# Altium PCB PCB.PcbDoc
Units mm, origin at the board's own origin, x right, y up, seen from the top; angles counter-clockwise.
Board outline 83 x 36 mm, 4 copper layers (Top Layer, Int1 (GND), Int2 (PWR), Bottom Layer), stack 1.369 mm thick; 146 components, 191 nets, 522 pads, 0 vias.
Unrouted connection lines stored in the file: 305.
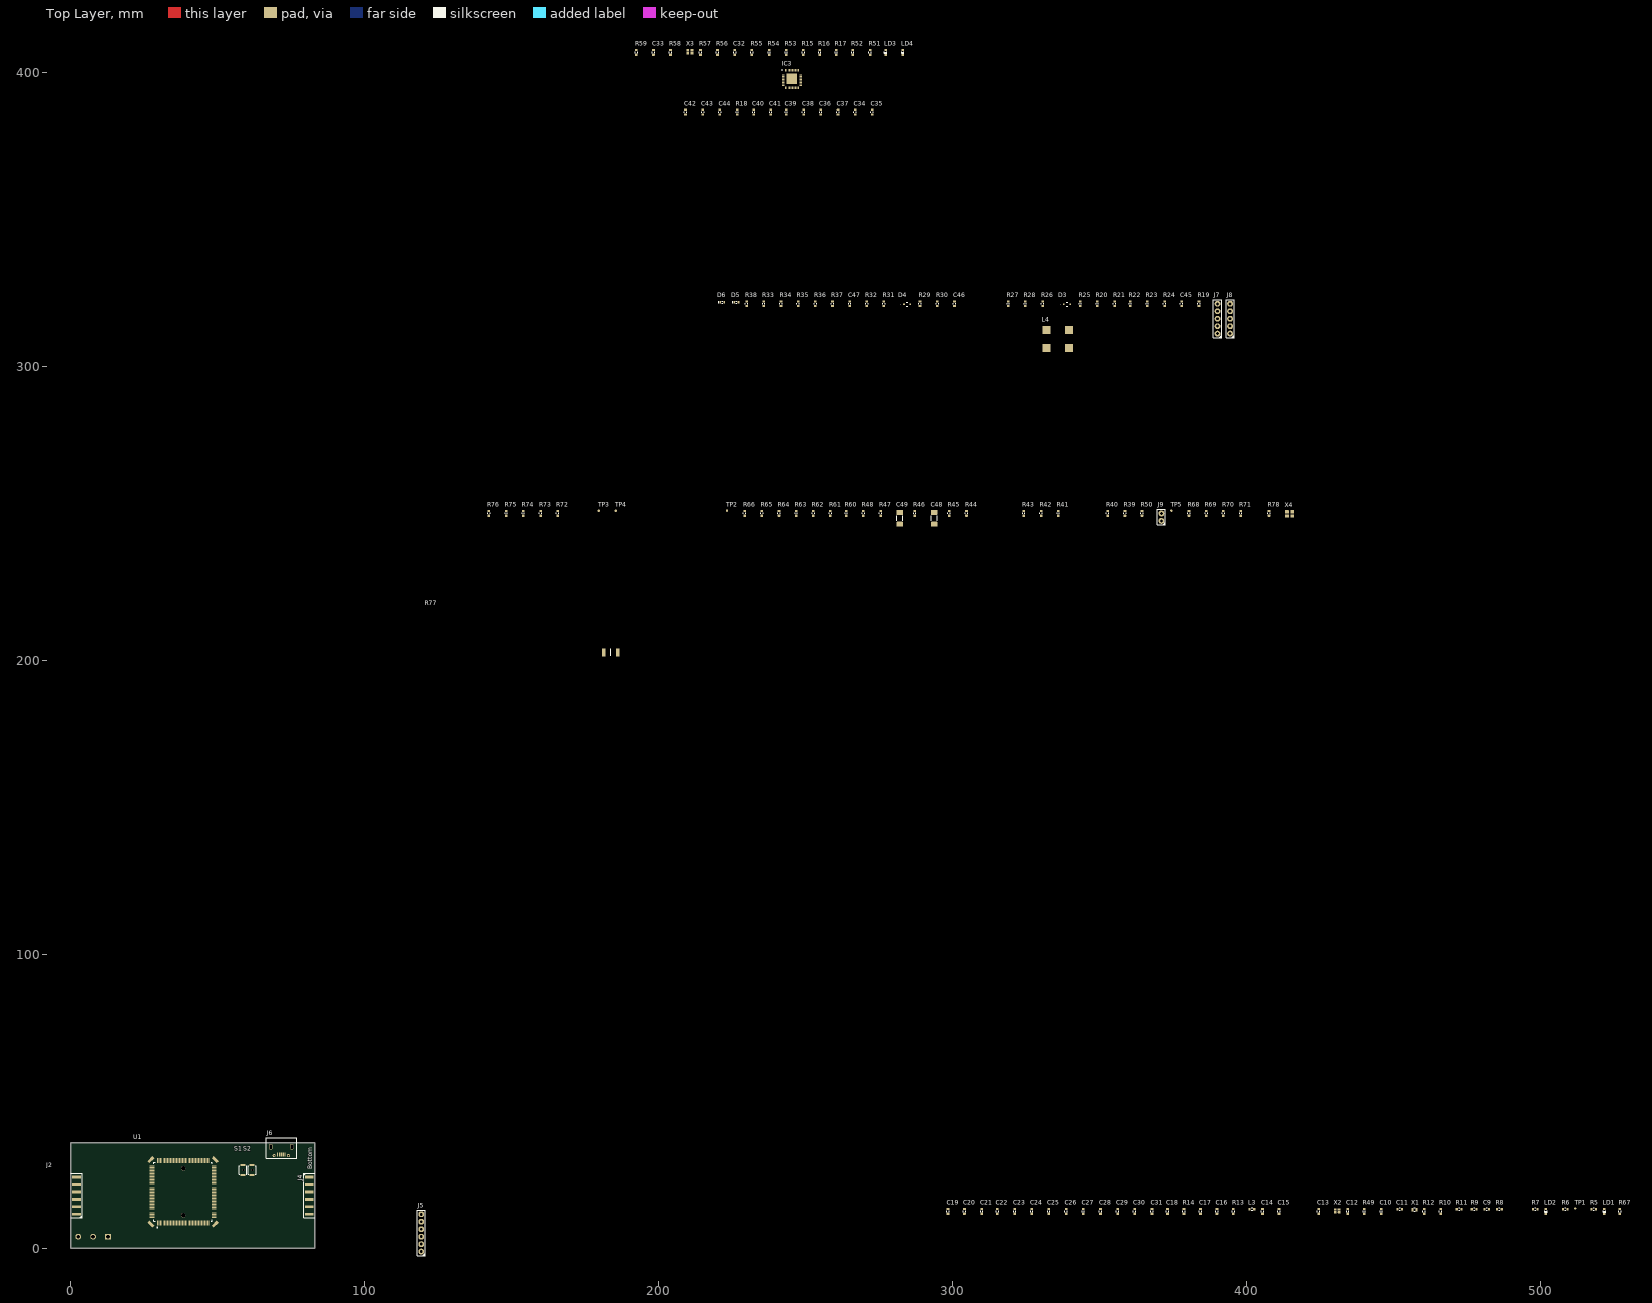
[diagram p0: Top Layer view]
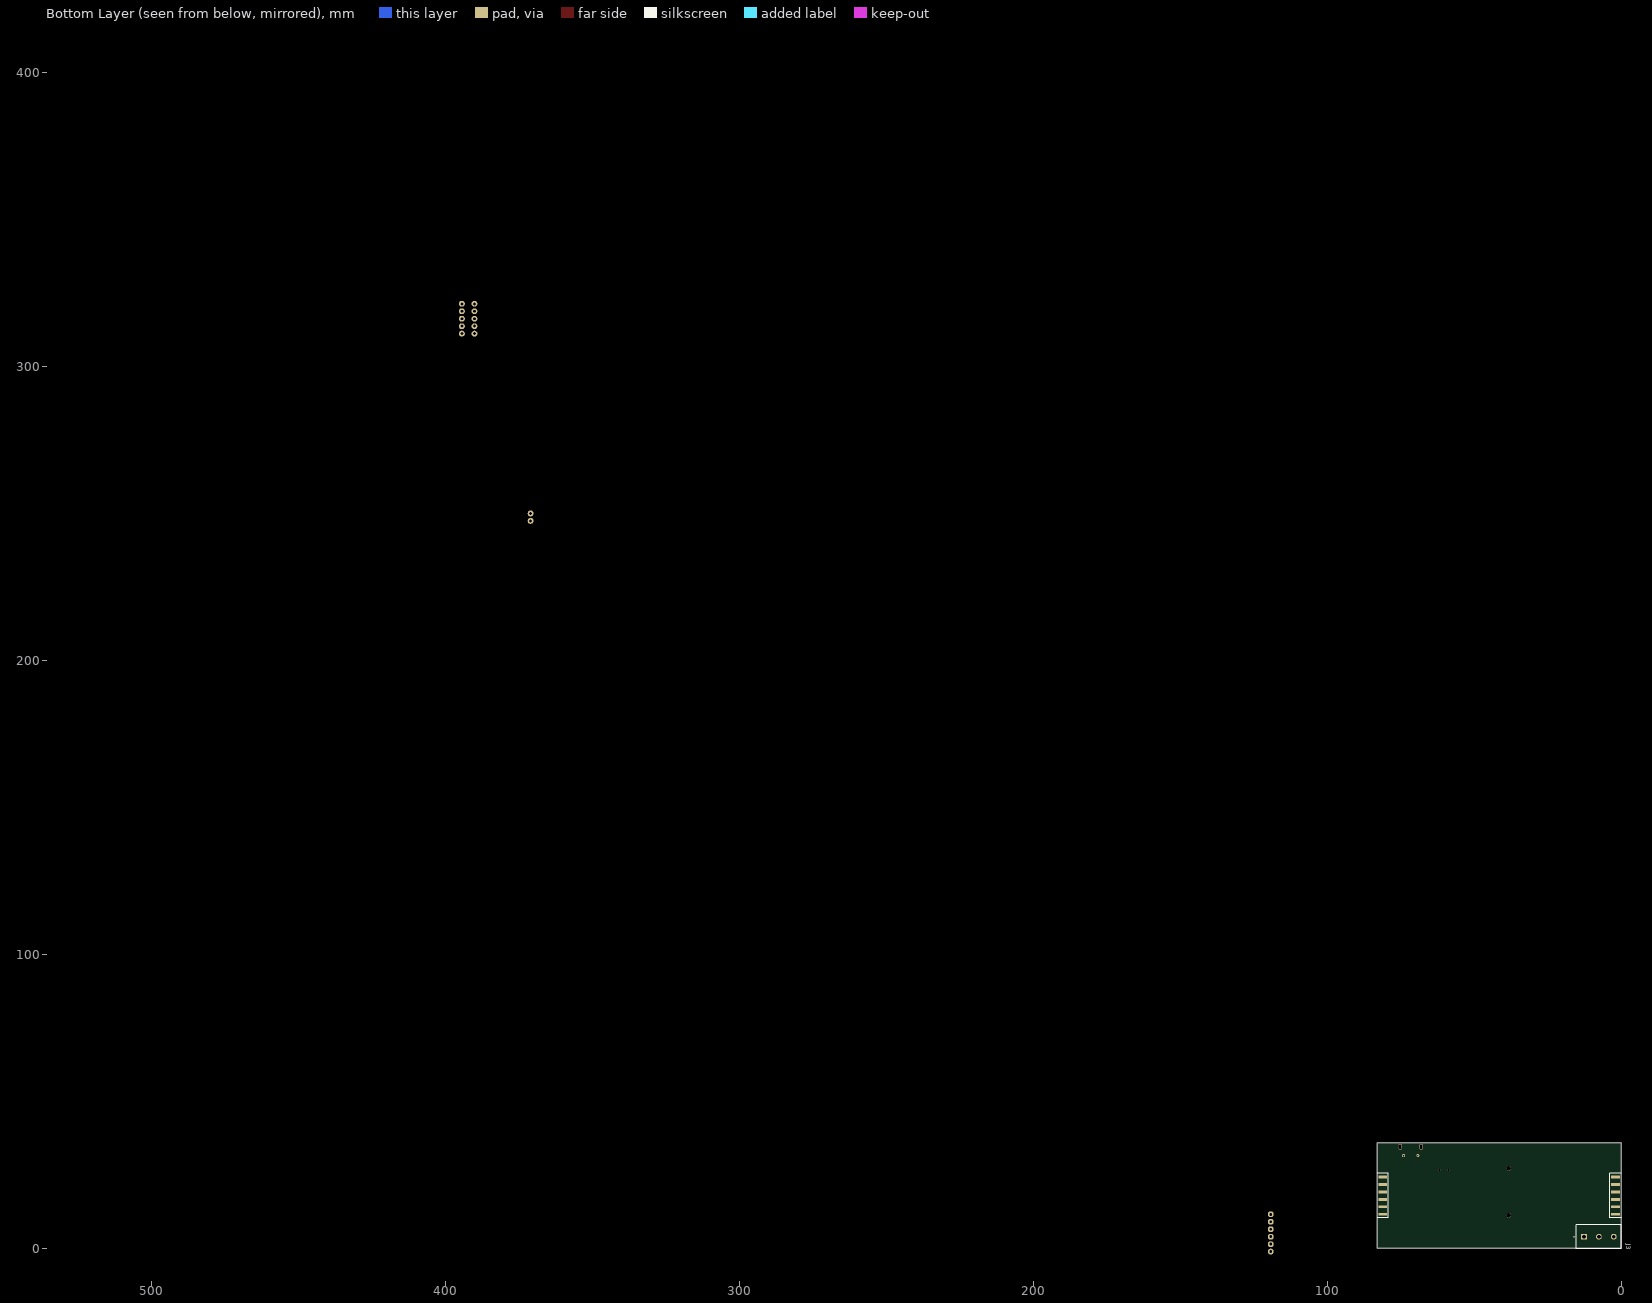
[diagram p1: Bottom Layer view, seen from below]
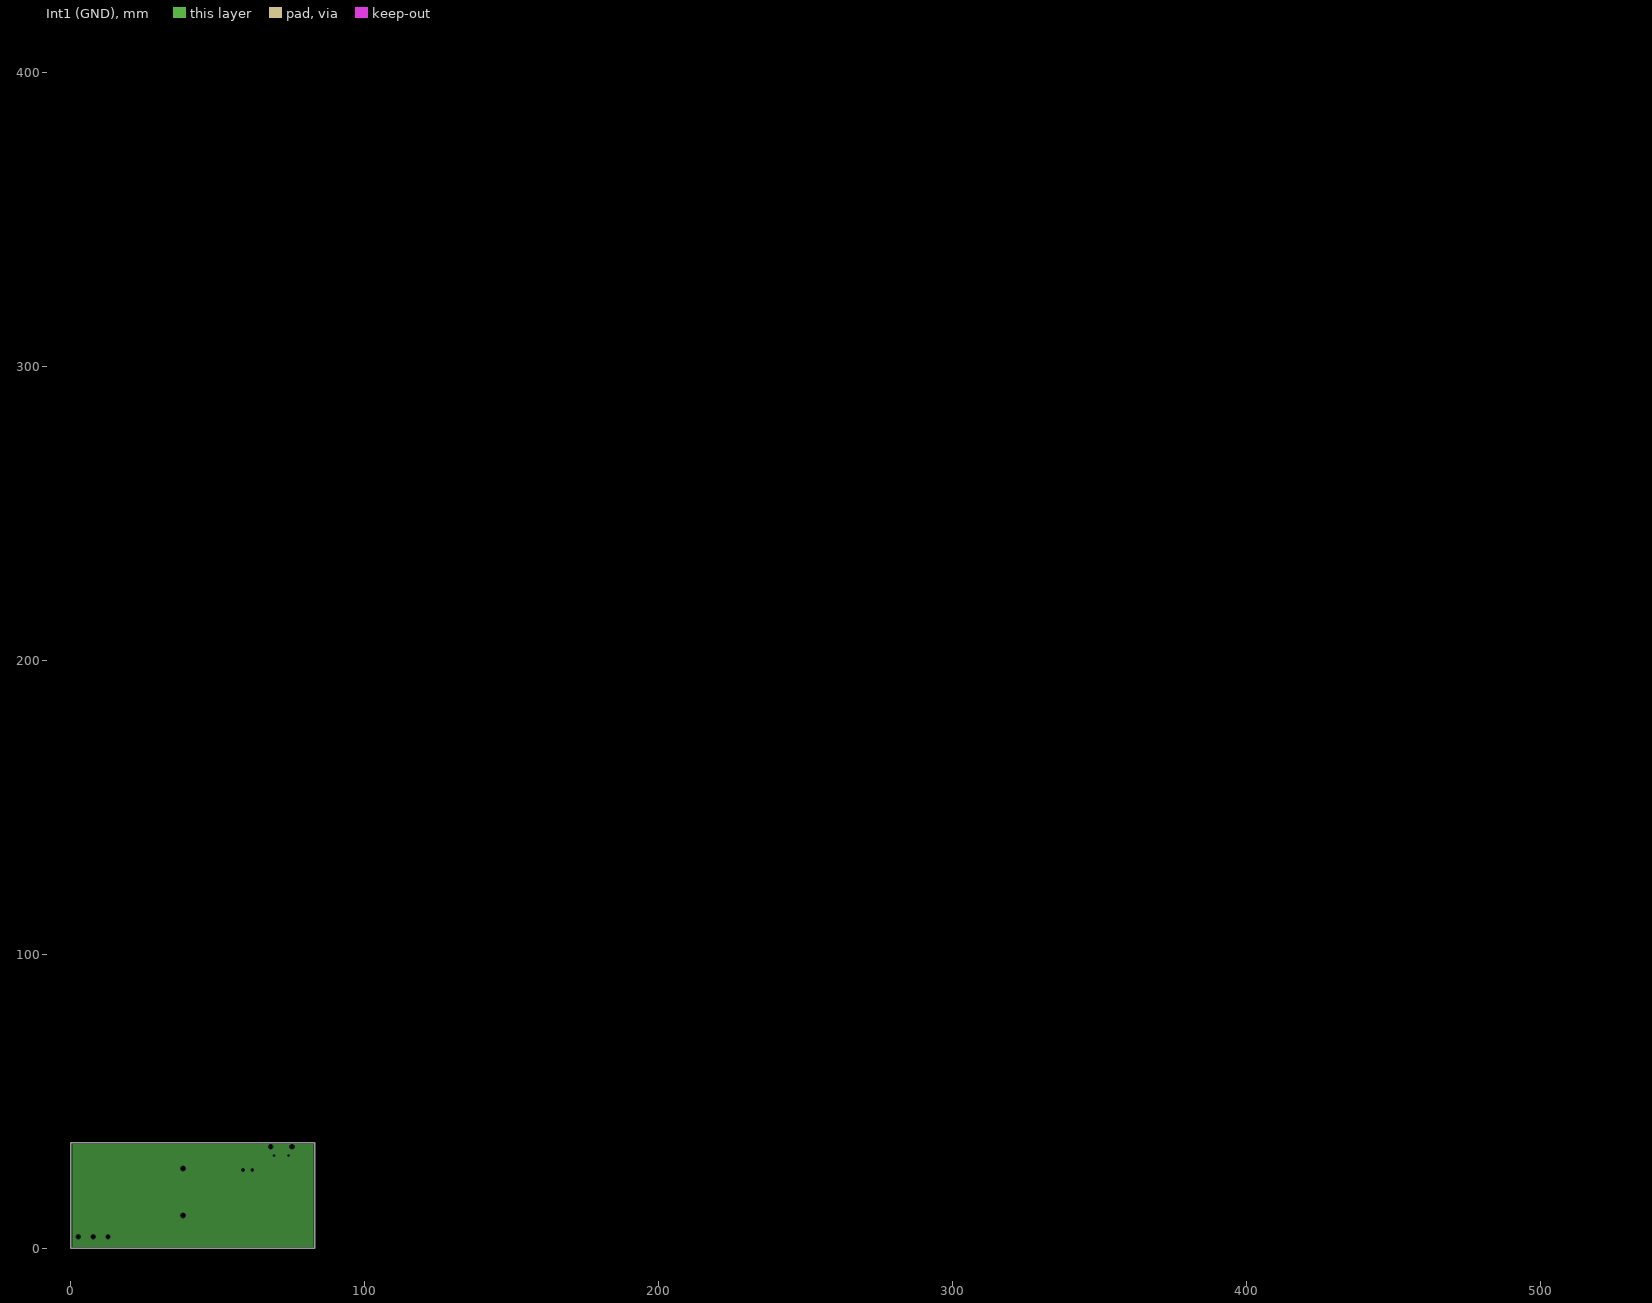
[diagram p2: Int1 (GND), clearances drawn from the general rule]
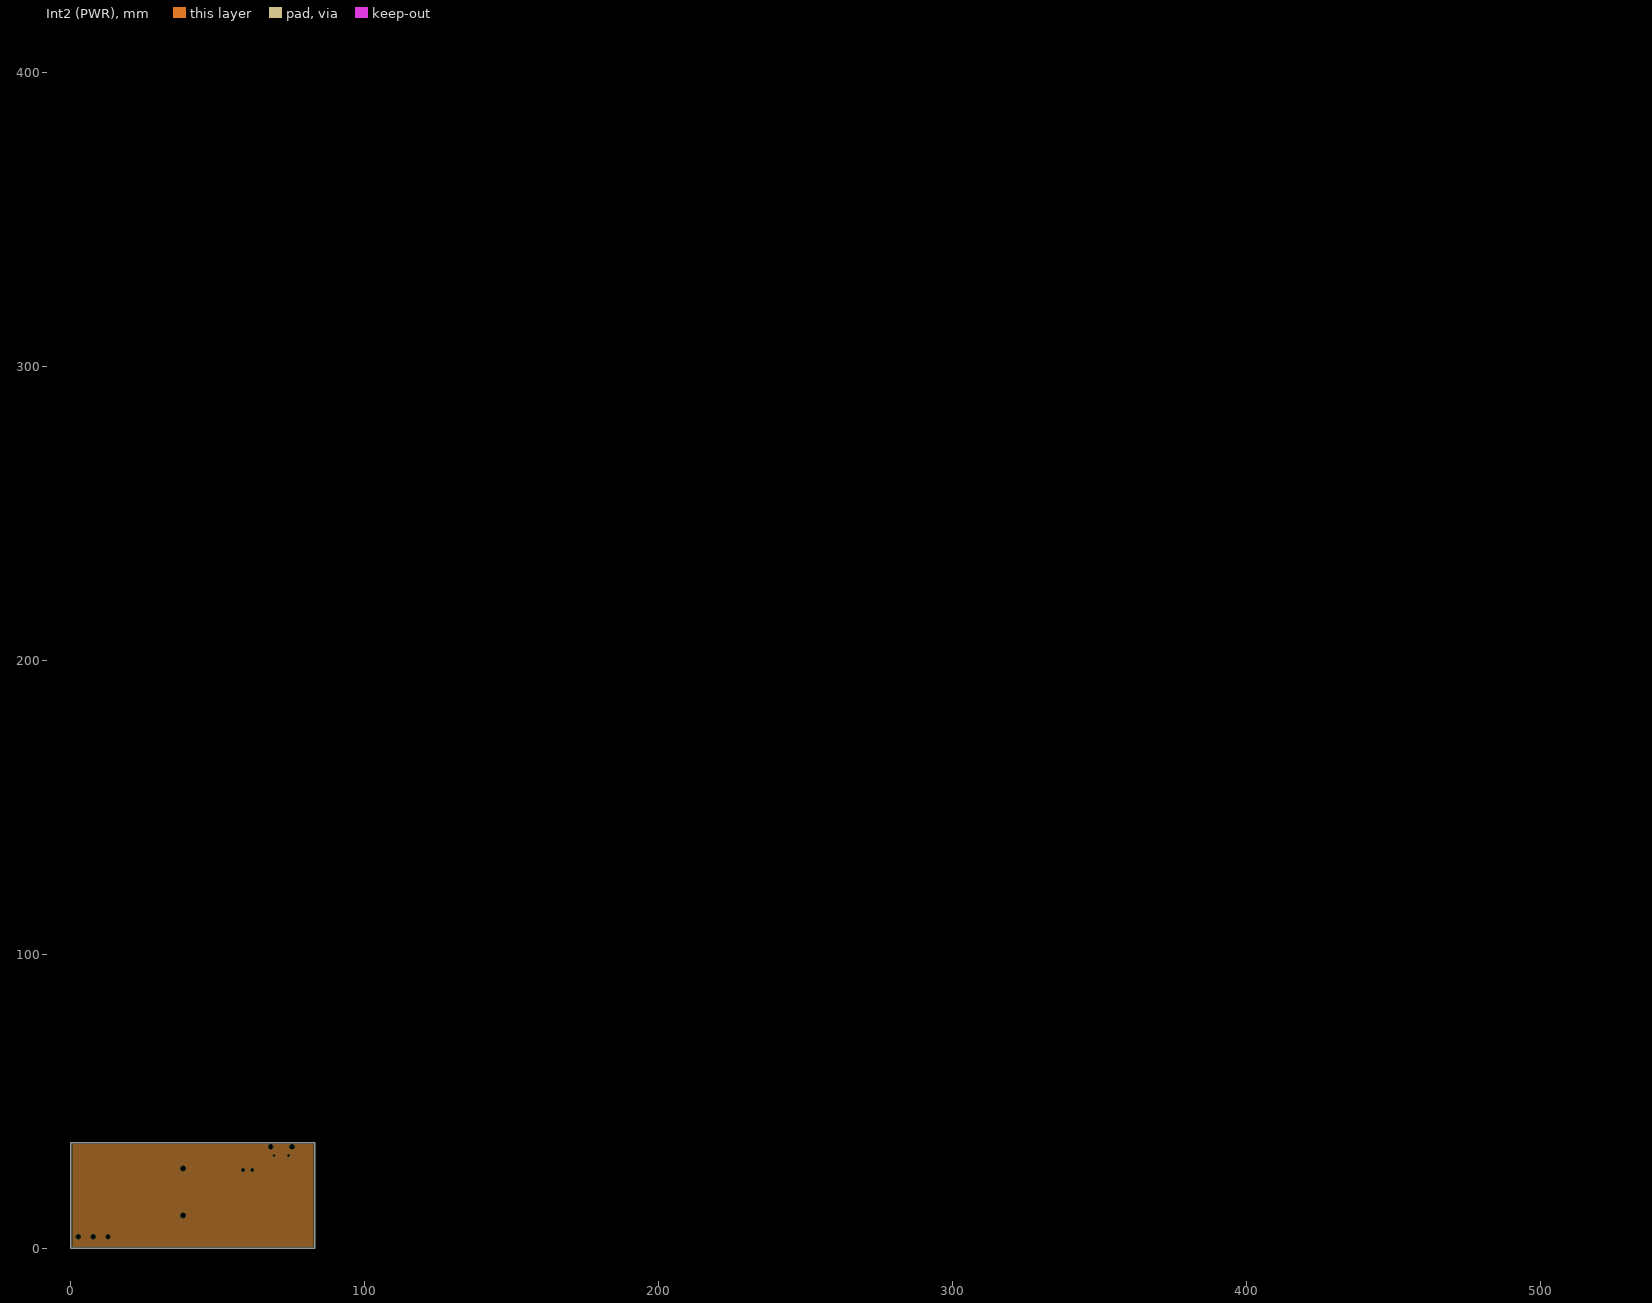
[diagram p3: Int2 (PWR), clearances drawn from the general rule]

## Layer stack, top to bottom
Top Solder: solder mask 0.0254, SM-001, Dk 4
Top Layer: signal copper 0.035
Dielectric 1: prepreg 0.1295, PP-017, Dk 4.3
Dielectric 2: prepreg 0.1295, PP-017, Dk 4.3
Int1 (GND): plane copper 0.035
Dielectric 3: core 0.7112, Core-039, Dk 4.8
Int2 (PWR): plane copper 0.035
Dielectric 4: prepreg 0.1295, PP-017, Dk 4.3
Dielectric 5: prepreg 0.1295, PP-017, Dk 4.3
Bottom Layer: signal copper 0.035
Bottom Solder: solder mask 0.0254, SM-001, Dk 4

## Board outline
0,0 83,0 83,36 0,36

## Design rules (kind name [scope] priority, off if disabled: settings)
AssemblyTestPointUsage [All] p1 off:
AssemblyTestpoint [All] p1 off: testpointundercomponent=TRUE minsize=1.016 maxsize=2.54 preferedsize=1.524 minholesize=0 maxholesize=1.016 preferedholesize=0.813 testpointgrid=0.025 usegrid=TRUE gridtolerance=0 allowsidetop=TRUE allowsidebottom=TRUE
Clearance [All] p1: gap=0.15 ignorepadtopadclearanceinfootprint=TRUE
ComponentClearance [All] p1 off: gap=0.254 collisioncheckmode=3 verticalgap=0.254 showdistances=FALSE
DiffPairsRouting [All] p1 off: maxlimit=0.254 minlimit=0.254 mostfreqgap=0.254 toplayer_minwidth=0.381 toplayer_maxwidth=0.381 toplayer_prefwidth=0.381 bottomlayer_minwidth=0.381 bottomlayer_maxwidth=0.381 bottomlayer_prefwidth=0.381 maxuncoupledlength=12.7
FabricationTestPointUsage [All] p1 off: valid=0 allowmultiple=FALSE
FabricationTestpoint [All] p1 off: side=3 testpointundercomponent=TRUE minsize=1.016 maxsize=2.54 preferedsize=1.524 minholesize=0 maxholesize=1.016 preferedholesize=0.813 testpointgrid=0.025 allowsidetop=TRUE allowsidebottom=TRUE usegrid=TRUE gridtolerance=0
FanoutControl Fanout_BGA [IsBGA] p1 off: bgadir=Out bgaviamode=Centered fanoutstyle=Auto fanoutdirection=Alternating viagrid=0.025 // Fanout_BGA (Default Rule)
FanoutControl Fanout_LCC [IsLCC] p2 off: bgadir=Out bgaviamode=Centered fanoutstyle=Auto fanoutdirection=Alternating viagrid=0.025 // Fanout_LCC (Default Rule)
FanoutControl Fanout_SOIC [IsSOIC] p3 off: bgadir=Out bgaviamode=Centered fanoutstyle=Auto fanoutdirection=Alternating viagrid=0.025 // Fanout_SOIC (Default Rule)
FanoutControl Fanout_Small [(CompPinCount < 5)] p4 off: bgadir=Out bgaviamode=Centered fanoutstyle=Auto fanoutdirection=OutThenIn viagrid=0.025 // Fanout_Small (Default Rule)
FanoutControl Fanout_Default [All] p5 off: bgadir=Out bgaviamode=Centered fanoutstyle=Auto fanoutdirection=Alternating viagrid=0.025 // Fanout_Default (Default Rule)
Height [All] p1 off: minheight=0 maxheight=25.4 prefheight=12.7
HoleSize [All] p1 off: absolutevalues=TRUE maxlimit=2.54 minlimit=0.025 maxpercent=80.000 minpercent=20.000
HoleToHoleClearance [All] p1 off: gap=0.254 allowstackedmicrovias=TRUE
LayerPairs [All] p1 off: enforce=TRUE
MinimumSolderMaskSliver [All] p1 off: minsoldermaskwidth=0.254
NetAntennae [All] p1 off: netantennaetolerance=0
PasteMaskExpansion [All] p1 off: expansion=0
PlaneClearance [All] p1: clearance=0.25
PlaneConnect [All] p1: planeconnectstyle=Relief reliefexpansion=0.508 reliefentries=4 reliefconductorwidth=0.254 reliefairgap=0.254
PolygonConnect [All] p1: thpad.connectstyle=Relief thpad.reliefconductorwidth=0.254 thpad.reliefentries=4 thpad.polygonreliefangle="90 Angle" thpad.airgapwidth=0.254 smdpad.connectstyle=Relief smdpad.reliefconductorwidth=0.254 smdpad.reliefentries=4 smdpad.polygonreliefangle="90 Angle" smdpad.airgapwidth=0.254 via.connectstyle=Direct via.reliefconductorwidth=0.254 via.reliefentries=4 via.polygonreliefangle="90 Angle" via.airgapwidth=0.254
RoutingCorners [All] p1 off: cornerstyle=45-Degree minsetback=2.54 maxsetback=2.54
RoutingLayers [All] p1 off: top layer_v5=TRUE bottom layer_v5=TRUE
RoutingPriority [All] p1 off: routingpriority=0
RoutingTopology [All] p1 off: topology=Shortest
RoutingVias [All] p1: holewidth=0.15 width=0.5 viastyle="Through Hole" minholewidth=0.15 minwidth=0.5 maxholewidth=0.15 maxwidth=0.5 viatemplateguid#1={0F8D6943-ADF0-4AAE-A0C8-86B730172CDF} viatemplatename#1=v50h15m0mx0
SilkToSilkClearance [All] p1 off: silktosilkclearance=0.254
SilkToSolderMaskClearance [IsPad] p1 off: minsilkscreentomaskgap=0.254 clearancetoexposedcopper=TRUE
SolderMaskExpansion [All] p1 off: expansion=0.102
Width [All] p1: maxlimit=2 minlimit=0.15 preferedwidth=0.25
4 further rules are at their usual default settings.

## Classes and differential pairs
component class Designator: C9 C10 C11 C12 C13 C14 C15 C16 C17 C18 C19 C20 C21 C22 C23 C24 C25 C26 C27 C28 C29 C30 C31 L3 LD1 LD2 R5 R6 R7 R8 R9 R10 R11 R12 R13 R14 R49 R67 S1 S2 TP1 U1 X1 X2

## Components (designator, comment, footprint, x,y, rotation, side; value= is the part's Value field where it differs from the comment)
C9 "NM" "CAPACITOR 1608 REFLOW" 481.699,13.4 r0 top
C10 "2pF" "CAPACITOR 1608 REFLOW" 445.799,12.6 r90 top
C11 "2pF" "CAPACITOR 1608 REFLOW" 452.099,13.4 r0 top
C12 "4.3pF" "CAPACITOR 1608 REFLOW" 434.4,12.6 r90 top
C13 "4.3pF" "CAPACITOR 1608 REFLOW" 424.5,12.6 r90 top
C14 "2.2uF" "CAPACITOR 1608 REFLOW" 405.4,12.6 r90 top
C15 "100nF" "CAPACITOR 1608 REFLOW" 411,12.6 r90 top
C16 "2.2uF" "CAPACITOR 1608 REFLOW" 389.9,12.6 r90 top
C17 "1uF" "CAPACITOR 1608 REFLOW" 384.3,12.6 r90 top
C18 "100nF" "CAPACITOR 1608 REFLOW" 373.1,12.6 r90 top
C19 "100nF" "CAPACITOR 1608 REFLOW" 298.4,12.6 r90 top
C20 "100nF" "CAPACITOR 1608 REFLOW" 304,12.6 r90 top
C21 "100nF" "CAPACITOR 1608 REFLOW" 309.9,12.6 r90 top
C22 "100nF" "CAPACITOR 1608 REFLOW" 315.2,12.6 r90 top
C23 "100nF" "CAPACITOR 1608 REFLOW" 321.1,12.6 r90 top
C24 "100nF" "CAPACITOR 1608 REFLOW" 326.9,12.6 r90 top
C25 "100nF" "CAPACITOR 1608 REFLOW" 332.7,12.6 r90 top
C26 "100nF" "CAPACITOR 1608 REFLOW" 338.6,12.6 r90 top
C27 "100nF" "CAPACITOR 1608 REFLOW" 344.4,12.6 r90 top
C28 "100nF" "CAPACITOR 1608 REFLOW" 350.3,12.6 r90 top
C29 "100nF" "CAPACITOR 1608 REFLOW" 356.1,12.6 r90 top
C30 "100nF" "CAPACITOR 1608 REFLOW" 361.9,12.6 r90 top
C31 "4.7uF" "CAPACITOR 1608 REFLOW" 367.8,12.6 r90 top
C32 "15pF" "CAPACITOR 1608 REFLOW" 225.9,406.9 r90 top
C33 "15pF" "CAPACITOR 1608 REFLOW" 198.2,406.9 r90 top
C34 "10nF" "CAPACITOR 1608 REFLOW" 266.8,386.6 r90 top
C35 "100nF" "CAPACITOR 1608 REFLOW" 272.6,386.6 r90 top
C36 "10nF" "CAPACITOR 1608 REFLOW" 255.1,386.6 r90 top
C37 "100nF" "CAPACITOR 1608 REFLOW" 261,386.6 r90 top
C38 "100nF" "CAPACITOR 1608 REFLOW" 249.3,386.6 r90 top
C39 "1uF" "CAPACITOR 1608 REFLOW" 243.4,386.6 r90 top
C40 "10nF" "CAPACITOR 1608 REFLOW" 232.3,386.6 r90 top
C41 "100nF" "CAPACITOR 1608 REFLOW" 238.1,386.6 r90 top
C42 "100nF" "CAPACITOR 1608 REFLOW" 209.1,386.6 r90 top
C43 "10nF" "CAPACITOR 1608 REFLOW" 215,386.6 r90 top
C44 "1uF" "CAPACITOR 1608 REFLOW" 220.8,386.6 r90 top
C45 "220nF/100V" "CAPACITOR 1608 REFLOW" 377.899,321.4 r90 top
C46 "NM" "CAPACITOR 1608 REFLOW" 300.6,321.4 r90 top
C47 "220nF/100V" "CAPACITOR 1608 REFLOW" 265,321.4 r90 top
C48 "100pF / 3000V" "CAPACITOR 4520 REFLOW" 293.699,248.4 r90 top
C49 "100pF / 3000V" "CAPACITOR 4520 REFLOW" 281.999,248.4 r90 top
D3 "PESD1IVN27-AX" PESD1IVN27AX 338.9,321.2 r0 top
D4 "PESD1IVN27-AX" PESD1IVN27AX 284.5,321.2 r0 top
D5 "CPDH3V3UP" CPDH3V3UP 226.4,321.9 r0 top
D6 "CPDH3V3UP" CPDH3V3UP 221.6,321.9 r0 top
IC3 "ADIN1100CCPZ" QFN50P600X600X80-41N-D 245.3,397.9 r0 top
J2 "*" "PINHEADER2X6 P2.54 SIDE MOUNT" 0,18 r180 top
J3 "1729131" 1729131 12.66,4 r180 bottom
J4 "*" "PINHEADER2X6 P2.54 SIDE MOUNT" 83.005,18 r0 top
J5 "*" "PinHeader1x6 P2.54" 119.2,5.27 r90 top
J6 "USB-MICRO-B HIROSE ZX62D-B-5PA8" "USB-MICRO-B HIROSE ZX62D-B-5PA8" 71.6,31.925 r180 top
J7 "" "PinHeader1x5 P2.54" 390.099,316.3 r90 top
J8 "" "PinHeader1x5 P2.54" 394.399,316.3 r90 top
J9 "*" "PinHeader1x2 P2.54" 370.999,248.8 r90 top
L3 "" "INDUCTOR 1608 REFLOW" 401.8,13.4 r0 top
L4 "744272471" WE-SL575 335.7,309.4 r0 top
LD1 "BLUE" "LED 1608 REFLOW" 521.699,12.6 r90 top
LD2 "RED" "LED 1608 REFLOW" 501.799,12.6 r90 top
LD3 "YELLOW" "LED 1608 REFLOW" 277.199,406.9 r90 top
LD4 "GREEN" "LED 1608 REFLOW" 282.999,406.9 r90 top
R5 "680" "RESISTOR 1608 REFLOW" 518.099,13.4 r0 top
R6 "10k" "RESISTOR 1608 REFLOW" 508.399,13.4 r0 top
R7 "1k" "RESISTOR 1608 REFLOW" 498.199,13.4 r0 top
R8 "330" "RESISTOR 1608 REFLOW" 485.999,13.4 r0 top
R9 "100" "RESISTOR 1608 REFLOW" 477.399,13.4 r0 top
R10 "0" "RESISTOR 1608 REFLOW" 465.999,12.6 r90 top
R11 "0" "RESISTOR 1608 REFLOW" 472.299,13.4 r0 top
R12 "220k" "RESISTOR 1608 REFLOW" 460.399,12.6 r90 top
R13 "10k" "RESISTOR 1608 REFLOW" 395.5,12.6 r90 top
R14 "0" "RESISTOR 1608 REFLOW" 378.7,12.6 r90 top
R15 "10k" "RESISTOR 1608 REFLOW" 249.2,406.9 r90 top
R16 "4.7k" "RESISTOR 1608 REFLOW" 254.799,406.9 r90 top
R17 "10k" "RESISTOR 1608 REFLOW" 260.399,406.9 r90 top
R18 "1.5k" "RESISTOR 1608 REFLOW" 226.7,386.6 r90 top
R19 "0" "RESISTOR 1608 REFLOW" 383.799,321.4 r90 top
R20 "0" "RESISTOR 1608 REFLOW" 349.2,321.4 r90 top
R21 "10k" "RESISTOR 1608 REFLOW" 355.1,321.4 r90 top
R22 "0" "RESISTOR 1608 REFLOW" 360.4,321.4 r90 top
R23 "0" "RESISTOR 1608 REFLOW" 366.199,321.4 r90 top
R24 "49.9" "RESISTOR 1608 REFLOW" 372.099,321.4 r90 top
R25 "1Meg" "RESISTOR 1608 REFLOW" 343.4,321.4 r90 top
R26 "5.1k" "RESISTOR 1608 REFLOW" 330.6,321.4 r90 top
R27 "200" "RESISTOR 1608 REFLOW" 318.9,321.4 r90 top
R28 "10k" "RESISTOR 1608 REFLOW" 324.7,321.4 r90 top
R29 "200" "RESISTOR 1608 REFLOW" 288.9,321.4 r90 top
R30 "10k" "RESISTOR 1608 REFLOW" 294.8,321.4 r90 top
R31 "5.1k" "RESISTOR 1608 REFLOW" 276.6,321.4 r90 top
R32 "1Meg" "RESISTOR 1608 REFLOW" 270.8,321.4 r90 top
R33 "0" "RESISTOR 1608 REFLOW" 235.7,321.4 r90 top
R34 "10k" "RESISTOR 1608 REFLOW" 241.6,321.4 r90 top
R35 "0" "RESISTOR 1608 REFLOW" 247.4,321.4 r90 top
R36 "0" "RESISTOR 1608 REFLOW" 253.3,321.4 r90 top
R37 "49.9" "RESISTOR 1608 REFLOW" 259.1,321.4 r90 top
R38 "0" "RESISTOR 1608 REFLOW" 229.9,321.4 r90 top
R39 "0" "RESISTOR 1608 REFLOW" 358.599,250.1 r90 top
R40 "0" "RESISTOR 1608 REFLOW" 352.699,250.1 r90 top
R41 "0" "RESISTOR 1608 REFLOW" 335.899,250.1 r90 top
R42 "0" "RESISTOR 1608 REFLOW" 330.099,250.1 r90 top
R43 "0" "RESISTOR 1608 REFLOW" 324.199,250.1 r90 top
R44 "0" "RESISTOR 1608 REFLOW" 304.699,250.1 r90 top
R45 "0" "RESISTOR 1608 REFLOW" 298.799,250.1 r90 top
R46 "0" "RESISTOR 1608 REFLOW" 287.099,250.1 r90 top
R47 "0" "RESISTOR 1608 REFLOW" 275.5,250.1 r90 top
R48 "0" "RESISTOR 1608 REFLOW" 269.6,250.1 r90 top
R49 "0" "RESISTOR 1608 REFLOW" 439.999,12.6 r90 top
R50 "0" "RESISTOR 1608 REFLOW" 364.399,250.1 r90 top
R51 "4.7k" "RESISTOR 1608 REFLOW" 271.899,406.9 r90 top
R52 "4.7k" "RESISTOR 1608 REFLOW" 265.999,406.9 r90 top
R53 "4.7k" "RESISTOR 1608 REFLOW" 243.4,406.9 r90 top
R54 "4.7k" "RESISTOR 1608 REFLOW" 237.6,406.9 r90 top
R55 "4.7k" "RESISTOR 1608 REFLOW" 231.7,406.9 r90 top
R56 "4.7k" "RESISTOR 1608 REFLOW" 220,406.9 r90 top
R57 "4.7k" "RESISTOR 1608 REFLOW" 214.2,406.9 r90 top
R58 "4.7k" "RESISTOR 1608 REFLOW" 204,406.9 r90 top
R59 "4.7k" "RESISTOR 1608 REFLOW" 192.4,406.9 r90 top
R60 "0" "RESISTOR 1608 REFLOW" 263.8,250.1 r90 top
R61 "0" "RESISTOR 1608 REFLOW" 258.4,250.1 r90 top
R62 "0" "RESISTOR 1608 REFLOW" 252.6,250.1 r90 top
R63 "0" "RESISTOR 1608 REFLOW" 246.8,250.1 r90 top
R64 "0" "RESISTOR 1608 REFLOW" 240.9,250.1 r90 top
R65 "0" "RESISTOR 1608 REFLOW" 235.1,250.1 r90 top
R66 "0" "RESISTOR 1608 REFLOW" 229.2,250.1 r90 top
R67 "0" "RESISTOR 1608 REFLOW" 526.999,12.6 r90 top
R68 "0" "RESISTOR 1608 REFLOW" 380.399,250.1 r90 top
R69 "0" "RESISTOR 1608 REFLOW" 386.299,250.1 r90 top
R70 "0" "RESISTOR 1608 REFLOW" 392.099,250.1 r90 top
R71 "0" "RESISTOR 1608 REFLOW" 397.999,250.1 r90 top
R72 "0" "RESISTOR 1608 REFLOW" 165.6,250.1 r90 top
R73 "0" "RESISTOR 1608 REFLOW" 159.8,250.1 r90 top
R74 "0" "RESISTOR 1608 REFLOW" 153.9,250.1 r90 top
R75 "0" "RESISTOR 1608 REFLOW" 148.1,250.1 r90 top
R76 "0" "RESISTOR 1608 REFLOW" 142.2,250.1 r90 top
R77 "CRMA2010AF10M0FKEF" RESC5125X74N 183.7,202.8 r180 top
R78 "0" "RESISTOR 1608 REFLOW" 407.599,250.1 r90 top
S1 "" "Push Button C2.5X3.0 OMRON B3U-1000P(M)-B" 58.6,26.7 r90 top
S2 "" "Push Button C2.5X3.0 OMRON B3U-1000P(M)-B" 61.7,26.7 r90 top
TP1 "" "Pad D0.8" 511.799,13.6 r90 top
TP2 "*" "Pad D0.8" 223.2,251 r90 top
TP3 "*" "Pad D0.8" 179.6,251 r90 top
TP4 "*" "Pad D0.8" 185.4,251 r90 top
TP5 "*" "Pad D0.8" 374.399,251 r90 top
U1 "MCU_LQFP144" LQFP144_0R5_SKT 38.175,19.25 r0 top
X1 "32.768kHz" "Crystal C2.0x1.2 CTS TF20" 457.099,13.2 r0 top
X2 "8MHz" "Crystal C2.0x1.6 Abracon ABM11W" 430.8,12.8 r0 top
X3 "25Mhz" "Crystal C2.5x2 Seiko Epson FA-128" 210.6,407.1 r0 top
X4 "*" "Oscillator C2.5x2 Seiko Epson SPXO SG-210STF" 414.599,249.9 r0 top

## Footprints (in the part's own frame and the unit in brackets; to place one, negate y for a bottom-side part, rotate by r counter-clockwise, add the part's x,y. Pads: shape width x height; smd on the part's side, far side on the other; paste and mask are expansions set on the pad)
1729131 [mm]
  rect 1.95x1.95 hole 1.3: 1(0,0)
  round 1.95 hole 1.3: 2(5.08,0) 3(10.16,0)
  silkscreen extent -3.4,-4.08 12.7,4.08, body extent -2.95,-4.05 12.64,4.05, height 10.17
"CAPACITOR 1608 REFLOW" [mm] "Capacitor SMD 1.6x0.8mm (0603-imperial)"
  rrect25% 0.75x0.9 smd: 1(-0.8,0) 2(0.8,0)
  silkscreen extent -0.2,-0.4 0.2,0.4, body extent -0.8,-0.4 0.8,0.4, height 0.8
"CAPACITOR 4520 REFLOW" [mm] "Capacitor SMD 4.5x2.0mm (1808-imperial)"
  rrect25% 1.7x2.2 smd: 1(-2,0) 2(2,0)
  silkscreen extent -0.9,-1 0.9,1, body extent -2.3,-1 2.3,1, height 2
CPDH3V3UP [mm]
  rect 0.6x0.7 smd: 1(-0.71,0) 2(0.71,0)
  silkscreen extent -1.4,-0.4 0.2,0.4, body extent -0.95,-0.4 0.95,0.4, height 0.87
"Crystal C2.0x1.2 CTS TF20" [mm] "Crystal C2.0x1.2 CTS TF20"
  rrect25% 0.6x1.1 smd: 1(-0.7,0) 2(0.7,0)
  silkscreen extent -0.2,-0.6 0.2,0.6, body extent -1,-0.6 1,0.6, height 0.6
"Crystal C2.0x1.6 Abracon ABM11W" [mm] "Crystal C2.0x1.6 Abracon ABM11W, Height 0.5mm"
  rrect25% 0.875x0.775 smd: 1(-0.637,-0.487) 2(0.637,-0.487) 3(0.637,0.487) 4(-0.637,0.487)
  body extent -1,-0.8 1,0.8, height 0.5
"Crystal C2.5x2 Seiko Epson FA-128" [mm] "Crystal Seiko Epson FA-128, Case 2.0x1.6, Height 0.5"
  rect 0.95x0.85 smd: 1(-0.7,-0.55) 2(0.7,-0.55) 3(0.7,0.55) 4(-0.7,0.55)
  body extent -1.05,-0.85 1.05,0.85, height 0.56
"INDUCTOR 1608 REFLOW" [mm] "Inductor SMD 1.6x0.8mm (0603-imperial)"
  rrect25% 0.75x0.9 smd: 1(-0.8,0) 2(0.8,0)
  silkscreen extent -0.2,-0.4 0.2,0.4, body extent -0.8,-0.4 0.8,0.4, height 0.45
"LED 1608 REFLOW" [mm] "LED SMD 1.6x0.8mm (0603-imperial)"
  rrect25% 0.75x0.9 smd: 1(-0.8,0) 2(0.8,0)
  silkscreen extent -0.2,-0.4 0.2,0.4, body extent -0.8,-0.4 0.8,0.4, height 0.45
LQFP144_0R5_SKT [mm] "32-bit MCU ARM-based Cortex-M3 20 X 20mm, 0.5mm Pitch, 1.6mm Max thickness"
  rect 1x2.5 smd rot 45: 0(-10.96,-10.96) 0(10.96,10.96)
  rect 1x2.5 smd rot 135: 0(-10.96,10.96) 0(10.96,-10.96)
  round 1.5 hole 1.5 unplated: 0(0,-8) 0(0,8)
  rect 0.3x1.65 smd: 1(-8.75,-10.625) 2(-8.25,-10.625) 3(-7.75,-10.625) 4(-7.25,-10.625) 5(-6.75,-10.625) 6(-6.25,-10.625) 7(-5.75,-10.625) 8(-5.25,-10.625) 9(-4.75,-10.625) 10(-4.25,-10.625) 11(-3.75,-10.625) 12(-3.25,-10.625) 13(-2.75,-10.625) 14(-2.25,-10.625) 15(-1.75,-10.625) 16(-1.25,-10.625) 17(-0.75,-10.625) 18(-0.25,-10.625) 19(0.25,-10.625) 20(0.75,-10.625) 21(1.25,-10.625) 22(1.75,-10.625) 23(2.25,-10.625) 24(2.75,-10.625) 25(3.25,-10.625) 26(3.75,-10.625) 27(4.25,-10.625) 28(4.75,-10.625) 29(5.25,-10.625) 30(5.75,-10.625) 31(6.25,-10.625) 32(6.75,-10.625) 33(7.25,-10.625) 34(7.75,-10.625) 35(8.25,-10.625) 36(8.75,-10.625) 73(8.75,10.625) 74(8.25,10.625) 75(7.75,10.625) 76(7.25,10.625) 77(6.75,10.625) 78(6.25,10.625) 79(5.75,10.625) 80(5.25,10.625) 81(4.75,10.625) 82(4.25,10.625) 83(3.75,10.625) 84(3.25,10.625) 85(2.75,10.625) 86(2.25,10.625) 87(1.75,10.625) 88(1.25,10.625) 89(0.75,10.625) 90(0.25,10.625) 91(-0.25,10.625) 92(-0.75,10.625) 93(-1.25,10.625) 94(-1.75,10.625) 95(-2.25,10.625) 96(-2.75,10.625) 97(-3.25,10.625) 98(-3.75,10.625) 99(-4.25,10.625) 100(-4.75,10.625) 101(-5.25,10.625) 102(-5.75,10.625) 103(-6.25,10.625) 104(-6.75,10.625) 105(-7.25,10.625) 106(-7.75,10.625) 107(-8.25,10.625) 108(-8.75,10.625)
  rect 1.65x0.3 smd: 37(10.625,-8.75) 38(10.625,-8.25) 39(10.625,-7.75) 40(10.625,-7.25) 41(10.625,-6.75) 42(10.625,-6.25) 43(10.625,-5.75) 44(10.625,-5.25) 45(10.625,-4.75) 46(10.625,-4.25) 47(10.625,-3.75) 48(10.625,-3.25) 49(10.625,-2.75) 50(10.625,-2.25) 51(10.625,-1.75) 52(10.625,-1.25) 53(10.625,-0.75) 54(10.625,-0.25) 55(10.625,0.25) 56(10.625,0.75) 57(10.625,1.25) 58(10.625,1.75) 59(10.625,2.25) 60(10.625,2.75) 61(10.625,3.25) 62(10.625,3.75) 63(10.625,4.25) 64(10.625,4.75) 65(10.625,5.25) 66(10.625,5.75) 67(10.625,6.25) 68(10.625,6.75) 69(10.625,7.25) 70(10.625,7.75) 71(10.625,8.25) 72(10.625,8.75) 109(-10.625,8.75) 110(-10.625,8.25) 111(-10.625,7.75) 112(-10.625,7.25) 113(-10.625,6.75) 114(-10.625,6.25) 115(-10.625,5.75) 116(-10.625,5.25) 117(-10.625,4.75) 118(-10.625,4.25) 119(-10.625,3.75) 120(-10.625,3.25) 121(-10.625,2.75) 122(-10.625,2.25) 123(-10.625,1.75) 124(-10.625,1.25) 125(-10.625,0.75) 126(-10.625,0.25) 127(-10.625,-0.25) 128(-10.625,-0.75) 129(-10.625,-1.25) 130(-10.625,-1.75) 131(-10.625,-2.25) 132(-10.625,-2.75) 133(-10.625,-3.25) 134(-10.625,-3.75) 135(-10.625,-4.25) 136(-10.625,-4.75) 137(-10.625,-5.25) 138(-10.625,-5.75) 139(-10.625,-6.25) 140(-10.625,-6.75) 141(-10.625,-7.25) 142(-10.625,-7.75) 143(-10.625,-8.25) 144(-10.625,-8.75)
  silkscreen extent -10,-12.27 10,10, body extent -17.11,-17.11 17.11,17.12, height 14.3
"Oscillator C2.5x2 Seiko Epson SPXO SG-210STF" [mm] "Oscillator Seiko Epson SPXO SG-210STF, Case 2.5x2, Height 0.9"
  rrect25% 1.3x1.1 smd: 1(-0.9,-0.7) 2(0.9,-0.7) 3(0.9,0.7) 4(-0.9,0.7)
  body extent -1.3,-1 1.3,1, height 0.91
"Pad D0.8" [mm] "Test Point simple pad diameter 0.8, no hole"
  round 0.8 smd: 1(0,0)
PESD1IVN27AX [mm]
  rect 0.6x0.6 smd: 1(-1.1,0) 2(1.1,0)
  silkscreen extent -2.2,-0.63 0.25,0.63, body extent -1.34,-0.63 1.34,0.63, height 1.2
"PinHeader1x2 P2.54" [mm] "Plug connector"
  round 2 hole 1: 1(-1.27,0) 2(1.27,0)
  silkscreen extent -2.67,-1.4 2.67,1.4, body extent -2.61,-1.27 2.61,1.27, height 8.5
"PinHeader1x5 P2.54" [mm] "Plug connector"
  round 2 hole 1: 1(-5.08,0) 2(-2.54,0) 3(0,0) 4(2.54,0) 5(5.08,0)
  silkscreen extent -6.48,-1.4 6.48,1.4, body extent -6.43,-1.27 6.35,1.27, height 8.5
"PinHeader1x6 P2.54" [mm] "Plug connector"
  round 2 hole 1: 1(-6.35,0) 2(-3.81,0) 3(-1.27,0) 4(1.27,0) 5(3.81,0) 6(6.35,0)
  silkscreen extent -7.75,-1.4 7.75,1.4, body extent -7.62,-1.27 7.62,1.27, height 8.5
"PINHEADER2X6 P2.54 SIDE MOUNT" [mm] "Plug connector Mounted on PCB side"
  rect 3x1 smd: 1(-1.905,6.35) 3(-1.905,3.81) 5(-1.905,1.27) 7(-1.905,-1.27) 9(-1.905,-3.81) 11(-1.905,-6.35)
  rect 3x1 smd far side: 2(-1.905,6.35) 4(-1.905,3.81) 6(-1.905,1.27) 8(-1.905,-1.27) 10(-1.905,-3.81) 12(-1.905,-6.35)
  silkscreen extent -3.81,-7.62 0,7.62, body extent -2.86,-7.62 8.57,7.62, height 1.75
"Push Button C2.5X3.0 OMRON B3U-1000P(M)-B" [mm] "Push Button C2.5X3.0 OMRON B3U-1000P(M)-B"
  rrect25% 0.8x1.7 smd: 1(-1.7,0) 2(1.7,0)
  round 0.8 hole 0.8 unplated: 3(0,0)
  silkscreen extent -1.5,-1.3 1.5,1.3, body extent -1.5,-1.25 1.5,1.25, height 1.6
QFN50P600X600X80-41N-D [mm]
  rect 0.85x0.3 smd: 1(-2.95,2.25) 2(-2.95,1.75) 3(-2.95,1.25) 4(-2.95,0.75) 5(-2.95,0.25) 6(-2.95,-0.25) 7(-2.95,-0.75) 8(-2.95,-1.25) 9(-2.95,-1.75) 10(-2.95,-2.25) 21(2.95,-2.25) 22(2.95,-1.75) 23(2.95,-1.25) 24(2.95,-0.75) 25(2.95,-0.25) 26(2.95,0.25) 27(2.95,0.75) 28(2.95,1.25) 29(2.95,1.75) 30(2.95,2.25)
  rect 0.3x0.85 smd: 11(-2.25,-2.95) 12(-1.75,-2.95) 13(-1.25,-2.95) 14(-0.75,-2.95) 15(-0.25,-2.95) 16(0.25,-2.95) 17(0.75,-2.95) 18(1.25,-2.95) 19(1.75,-2.95) 20(2.25,-2.95) 31(2.25,2.95) 32(1.75,2.95) 33(1.25,2.95) 34(0.75,2.95) 35(0.25,2.95) 36(-0.25,2.95) 37(-0.75,2.95) 38(-1.25,2.95) 39(-1.75,2.95) 40(-2.25,2.95)
  rect 3.6x3.6 smd: 41(0,0)
  silkscreen extent -3.5,2.88 -3.25,3.12, body extent -3.05,-3.05 3.05,3.05, height 0.8
RESC5125X74N [mm]
  rect 1.15x2.7 smd: 1(-2.4,0) 2(2.4,0)
  silkscreen extent 0,-1.17 0,1.17, body extent -63.5,-15.24 63.5,0, height 63.5
"RESISTOR 1608 REFLOW" [mm] "Resistor SMD 1.6x0.8mm (0603-imperial)"
  rrect25% 0.75x0.9 smd: 1(-0.8,0) 2(0.8,0)
  silkscreen extent -0.2,-0.4 0.2,0.4, body extent -0.77,-0.42 0.78,0.43, height 0.45
"USB-MICRO-B HIROSE ZX62D-B-5PA8" [mm] "USB-MICRO-B HIROSE nr. ZX62D-B-5PA8"
  rect 0.4x1.35 smd: 1(-1.3,0) 2(-0.65,0) 3(0,0) 4(0.65,0) 5(1.3,0)
  round 1.016 hole 0.55: 6(2.425,0.325) 9(-2.425,0.325)
  oval 1.2x2 hole 0.8 slot 1.5 at 90 deg: 7(3.6,-2.675) 8(-3.6,-2.675)
  silkscreen extent -5.18,-5.72 5.18,1.2, body extent -4.05,-5.25 4.05,0.55, height 2.79
WE-SL575 [mm]
  rect 2.7x2.7 smd: 1(-3.81,3.11) 2(3.81,3.11) 3(3.81,-3.1) 4(-3.81,-3.11)

## Part data
C9 C10 C11 C12 C13 C14 C15 C16 C17 C18 C19 C20 C21 C22 C23 C24 C25 C26 C27 C28 C29 C30 C31 C32 C33 C34 C35 C36 C37 C38 C39 C40 C41 C42 C43 C44 C45 C46 C47 C48 C49: library part Capacitor, "Capacitor"
D3 D4: "Diode ESD (Bi-directional)", Manufacturer_Name=Nexperia, Mouser Part Number=771-PESD1IVN27-AX, Arrow Part Number=PESD1IVN27-AX, Arrow Price/Stock=https://www.arrow.com/en/products/pesd1ivn27-ax/nexperia, Datasheet Link=https://assets.nexperia.com/documents/data-sheet/PESD1IVN27-A.pdf, Height=1.1mm, Manufacturer_Part_Number=PESD1IVN27-AX, Mouser Price/Stock=https://www.mouser.co.uk/ProductDetail/Nexperia/PESD1IVN27-AX?qs=0lQeLiL1qyYTtxrCfdJstQ%3D%3D
D5 D6: "TVS Diode (Uni-directional)", Manufacturer_Name="Comchip Technology", Mouser Part Number=750-CPDH3V3UP, Arrow Part Number=CPDH3V3UP, Arrow Price/Stock=https://www.arrow.com/en/products/cpdh3v3up/comchip-technology, Datasheet Link=https://datasheet.datasheetarchive.com/originals/distributors/Datasheets-DGA26/1846145.pdf, Height=0.77mm, Manufacturer_Part_Number=CPDH3V3UP, Mouser Price/Stock=https://www.mouser.co.uk/ProductDetail/Comchip-Technology/CPDH3V3UP?qs=tw%252BuQ%2FB6PO1cIMMFw61gpA%3D%3D
IC3: "Integrated Circuit", Manufacturer_Name="Analog Devices", Mouser Part Number=584-ADIN1100CCPZ, Arrow Part Number=ADIN1100CCPZ, Arrow Price/Stock=https://www.arrow.com/en/products/adin1100ccpz/analog-devices?region=nac, Datasheet Link=https://www.analog.com/media/en/technical-documentation/data-sheets/adin1100.pdf, Height=0.8mm, Manufacturer_Part_Number=ADIN1100CCPZ, Mouser Price/Stock=https://www.mouser.co.uk/ProductDetail/Analog-Devices/ADIN1100CCPZ?qs=pUKx8fyJudC406QBDc8dqQ%3D%3D
J2 J4: library part PinHeader2x6, "Plug connector"
J3: "Connector", Manufacturer_Name="Phoenix Contact", Mouser Part Number=651-1729131, Arrow Part Number=1729131, Arrow Price/Stock=https://www.arrow.com/en/products/1729131/phoenix-contact, Datasheet Link=http://www.phoenixcontact.com/de/produkte/1729131/pdf, Height=10.15mm, Manufacturer_Part_Number=1729131, Mouser Price/Stock=https://www.mouser.co.uk/ProductDetail/Phoenix-Contact/1729131?qs=GFUSqQMLmmkspw%2F%2FW6PC3g%3D%3D
J5: library part PinHeader1x6, "Plug connector"
J7 J8: library part PinHeader1x5, "Plug connector"
J9: library part PinHeader1x2, "Plug connector"
L3: library part Inductor, "Inductor"
L4: "Inductor", Manufacturer_Name="Wurth Elektronik", Mouser Part Number=710-744272471, Manufacturer_Part_Number=744272471, Mouser Price/Stock=https://www.mouser.co.uk/ProductDetail/Wurth-Elektronik/744272471?qs=PGXP4M47uW4cnUBvOIMCOQ%3D%3D
LD1 LD2 LD3 LD4: library part LED, "LED generic"
R5 R6 R7 R8 R9 R10 R11 R12 R13 R14 R15 R16 R17 R18 R19 R20 R21 R22 R23 R24 R25 R26 R27 R28 R29 R30 R31 R32 R33 R34 R35 R36 R37 R38 R39 R40 R41 R42 R43 R44 R45 R46 R47 R48 R49 R50 R51 R52 R53 R54 R55 R56 R57 R58 R59 R60 R61 R62 R63 R64 R65 R66 R67 R68 R69 R70 R71 R72 R73 R74 R75 R76 R78: library part Resistor, "Resistor"
R77: library part CRMA2010AF1K00FKEF, "Resistor", Manufacturer_Name=Vishay, Mouser Part Number=71-CRMA2010AF1K00FKF, Arrow Part Number=CRMA2010AF1K00FKEF, Arrow Price/Stock=https://www.arrow.com/en/products/crma2010af1k00fkef/vishay, Datasheet Link=https://www.vishay.com/docs/68043/crma.pdf, Height=0.74mm, Manufacturer_Part_Number=CRMA2010AF1K00FKEF, Mouser Price/Stock=https://www.mouser.co.uk/ProductDetail/Vishay-Techno/CRMA2010AF1K00FKEF?qs=1mbolxNpo8fLEeNjiEgpoA%3D%3D
S1 S2: library part "Push Button 2Pins", "Push Button, 2 pins"
TP1 TP2 TP3 TP4 TP5: library part Pad, "Pad"
X1: library part "Crystal C2.0x1.2 CTS TF20", "Crystal C2.0x1.2 CTS TF20"
X2: library part "Crystal C2.0x1.6 Abracon ABM11W", "Crystal C2.0x1.6 Abracon ABM11W"
X3: library part "Crystal C2.5x2 Seiko Epson FA-128", "Crystal C2.5x2 Seiko Epson FA-128"
X4: library part "Oscillator C2.5x2.0 Seiko Epson SPXO SG-210STF", "Oscillator C2.5x2 Seiko Epson SPXO SG-210STF"

## Nets (pads, with @x,y where several pads share a name; then routed paths per layer and width w, separated by ;. In a path a pad name is that pad's centre, name@x,y a point inside that pad or via, vN(x,y) a via of type N, cw(c..) or ccw(c..) an arc to the next point about the centre after c; other vN are vias at no path point)
+3V3: C17.2 C19.1 C20.1 C21.1 C22.1 C23.1 C24.1 C25.1 C26.1 C27.1 C28.1 C29.1 C30.1 C31.1 C34.2 C35.2 C36.2 C37.2 C40.2 C41.2 IC3.16 IC3.17 IC3.22 IC3.35 J4.11 J5.1 L3.1 LD3.2 LD4.2 R9.2 R15.2 R18.1 R51.1 R52.1 R53.1 R54.1 R55.1 R56.1 R57.1 R58.1 R59.1 R78.2 S1.2 U1.6 U1.17 U1.30 U1.39 U1.52 U1.62 U1.72 U1.84 U1.95 U1.108 U1.121 U1.131 U1.143 U1.144
A+3V3: C18.1 L3.2 U1.32 U1.33
AGND: C18.2 R14.2 U1.31
GND: C10.1 C11.1 C12.2 C13.2 C14.2 C15.1 C16.2 C17.1 C19.2 C20.2 C21.2 C22.2 C23.2 C24.2 C25.2 C26.2 C27.2 C28.2 C29.2 C30.2 C31.2 C32.2 C33.2 C34.1 C35.1 C36.1 C37.1 C38.1 C39.1 C40.1 C41.1 C42.1 C43.1 C44.1 C48.2 C49.2 D5.2 D6.2 IC3.41 J2.9 J3.3 J4.9 J5.3 J6.6 J6.7 J6.8 J6.9 LD1.1 LD2.1 R12.2 R13.2 R14.1 R76.2 R77.1 R77.2 S2.2 U1.16 U1.38 U1.51 U1.61 U1.83 U1.94 U1.107 U1.120 U1.130 X2.2 X2.4 X3.2 X3.4 X4.2
LINK_ST: IC3.4 R59.2
NetC9_1: C9.1 R9.1
NetC9_2: C9.2 R8.2 R12.1 S1.1
NetC10_2: C10.2 R10.2 X1.1
NetC11_2: C11.2 R11.1 X1.2
NetC14_1: C14.1 U1.106
NetC16_1: C16.1 U1.71
NetC32_1: C32.1 IC3.8 X3.1
NetC33_1: C33.1 IC3.9 X3.3
NetC38_2: C38.2 IC3.19
NetC39_2: C39.2 IC3.20
NetC42_2: C42.2 C43.2 C44.2 IC3.23 IC3.24
NetC46_1: C46.1 R29.1 R30.2
NetC46_2: C46.2 R27.1 R28.2
NetC48_1: C48.1 D3.1 J3.1 R19.2 R20.2
NetC49_1: C49.1 D4.1 J3.2 R33.2 R38.2
NetD3_2: D3.2 D4.2
NetIC3_1: IC3.1 R44.1
NetIC3_3: IC3.3 R17.1
NetIC3_5: IC3.5 R39.1
NetIC3_6: IC3.6 R15.1 R16.1
NetIC3_7: IC3.7 R40.1 R50.2
NetIC3_26: IC3.26 R18.2 R66.1
NetIC3_27: IC3.27 R65.1
NetIC3_36: IC3.36 TP4.1
NetIC3_37: IC3.37 R46.1
NetIC3_38: IC3.38 R41.1
NetIC3_39: IC3.39 R42.1
NetIC3_40: IC3.40 R43.1
NetJ5_2: J5.2 R70.1
NetJ5_4: J5.4 R69.1
NetJ5_5: J5.5 R71.1
NetJ5_6: J5.6 R68.1
NetJ6_1: J6.1 R72.1
NetJ6_2: J6.2 R73.1
NetJ6_3: J6.3 R74.1
NetJ6_4: J6.4 R75.1
NetJ6_5: J6.5 R76.1
NetL4_1: L4.1 R20.1 R21.2
NetL4_4: L4.4 R33.1 R34.2
NetLD1_2: LD1.2 R5.1
NetLD2_2: LD2.2 R7.1
NetLD3_1: LD3.1 R16.2
NetLD4_1: LD4.1 R17.2
NetR6_2: R6.2 R72.2
NetR13_1: R13.1 U1.138
NetR47_2: R47.2 R67.1
NetR49_1: R49.1 TP5.1
NetR50_1: R50.1 X4.3
NetR78_1: R78.1 X4.1 X4.4
NRST: C15.2 R39.2 R71.2 S2.1 U1.25
PA0: TP3.1 U1.34
PA1: R40.2 R67.2 U1.35
PA2: R66.2 U1.36
PA3: TP2.1 U1.37
PA4: U1.40
PA5: U1.41
PA6: U1.42
PA7: R63.2 U1.43
PA8: TP1.1 U1.100
PA9: R6.1 U1.101
PA10: R75.2 U1.102
PA11: R73.2 U1.103
PA12: R74.2 U1.104
PA13: R69.2 U1.105
PA14: R70.2 U1.109
PA15: J2.7 U1.110
PB0: R61.2 U1.46
PB1: R62.2 U1.47
PB2: U1.48
PB3: R68.2 U1.133
PB4: U1.134
PB5: U1.135
PB6: U1.136
PB7: R5.2 U1.137
PB8: U1.139
PB9: U1.140
PB10: R64.2 U1.69
PB11: U1.70
PB12: U1.73
PB13: R43.2 U1.74
PB14: R7.2 U1.75
PB15: U1.76
PC0: U1.26
PC1: R65.2 U1.27
PC2: R44.2 U1.28
PC3: R41.2 U1.29
PC4: R48.2 U1.44
PC5: R60.2 U1.45
PC6: J4.3 U1.96
PC7: J4.1 U1.97
PC8: J4.5 U1.98
PC9: J4.7 U1.99
PC10: J2.5 U1.111
PC11: J2.1 U1.112
PC12: J2.3 U1.113
PC13: R8.1 U1.7
PC14: R11.2 U1.8
PC15: R10.1 U1.9
PD0: U1.114
PD1: U1.115
PD2: U1.116
PD3: U1.117
PD4: U1.118
PD5: U1.119
PD6: U1.122
PD7: U1.123
PD8: J9.1 U1.77
PD9: J9.2 U1.78
PD10: U1.79
PD11: U1.80
PD12: U1.81
PD13: U1.82
PD14: U1.85
PD15: U1.86
PE0: R45.2 U1.141
PE1: U1.142
PE2: U1.1
PE3: U1.2
PE4: U1.3
PE5: U1.4
PE6: U1.5
PE7: U1.58
PE8: U1.59
PE9: U1.60
PE10: U1.63
PE11: U1.64
PE12: U1.65
PE13: U1.66
PE14: U1.67
PE15: U1.68
PF0: U1.10
PF1: U1.11
PF2: U1.12
PF3: U1.13
PF4: U1.14
PF5: U1.15
PF6: U1.18
PF7: U1.19
PF8: U1.20
PF9: U1.21
PF10: U1.22
PF11: U1.49
PF12: U1.50
PF13: U1.53
PF14: U1.54
PF15: U1.55
PG0: U1.56
PG1: U1.57
PG2: U1.87
PG3: U1.88
PG4: U1.89
PG5: U1.90
PG6: U1.91
PG7: U1.92
PG8: U1.93
PG9: U1.124
PG10: U1.125
PG11: R46.2 U1.126
PG12: U1.127
PG13: R42.2 U1.128
PG14: U1.129
PG15: U1.132
PH0: C12.1 R49.2 U1.23 X2.1
PH1: C13.1 U1.24 X2.3
RX_CLK: IC3.32 R47.1 R54.2
RX_DV: IC3.33 R53.2 R63.1
RX_ER: IC3.34 R52.2 R64.1
RXD_0: IC3.31 R48.1 R55.2
RXD_1: IC3.30 R56.2 R60.1
RXD_2: IC3.29 R57.2 R61.1
RXD_3: IC3.28 R58.2 R62.1
RXN: IC3.13 R26.1 R28.1
RXP: IC3.14 R30.1 R31.1
T0+: J7.1 R19.1
T0-: J8.1 R38.1
T1+: C45.2 J7.2 L4.2 R21.1 R25.2
T1-: C47.2 J8.2 L4.3 R32.2 R34.1
T2+: C45.1 J7.3 R22.2 R25.1
T2-: C47.1 J8.3 R32.1 R35.2
T3+: J7.4 R22.1 R23.2 R26.2
T3-: J8.4 R31.2 R35.1 R36.2
T4+: D5.1 J7.5 R23.1 R24.2
T4-: D6.1 J8.5 R36.1 R37.2
TXD_3: IC3.2 R45.1 R51.2
TXN: IC3.12 R24.1 R29.2
TXP: IC3.15 R27.2 R37.1
pads on no net: IC3.10 IC3.11 IC3.18 IC3.21 IC3.25 J2.2 J2.4 J2.6 J2.8 J2.10 J2.11 J2.12 J4.2 J4.4 J4.6 J4.8 J4.10 J4.12 S1.3 S2.3 U1.0

## Polygon pours and split planes (outlines as drawn)
no net on Int1 (GND) (split plane): 82.49,0.51 0.51,0.51 0.51,35.49 82.49,35.49
no net on Int2 (PWR) (split plane): 82.49,0.51 0.51,0.51 0.51,35.49 82.49,35.49

## Silkscreen, mask and mechanical layers (free items; w line width, h text height)
Top Overlay:
  text "Bottom" at 82.1,26.9 h1.52 r90